# Altium PCB PIPOCPUF_2006.PCBDOC (part 5 of 6)
Units mil, origin at the board's own origin, x right, y up, seen from the top; angles counter-clockwise.
Board outline 8500 x 4525 mil, 2 copper layers (Top Layer, Top, Bottom Layer, Bottom); 345 components, 259 nets, 1116 pads, 603 vias.
Unrouted connection lines stored in the file: 781.
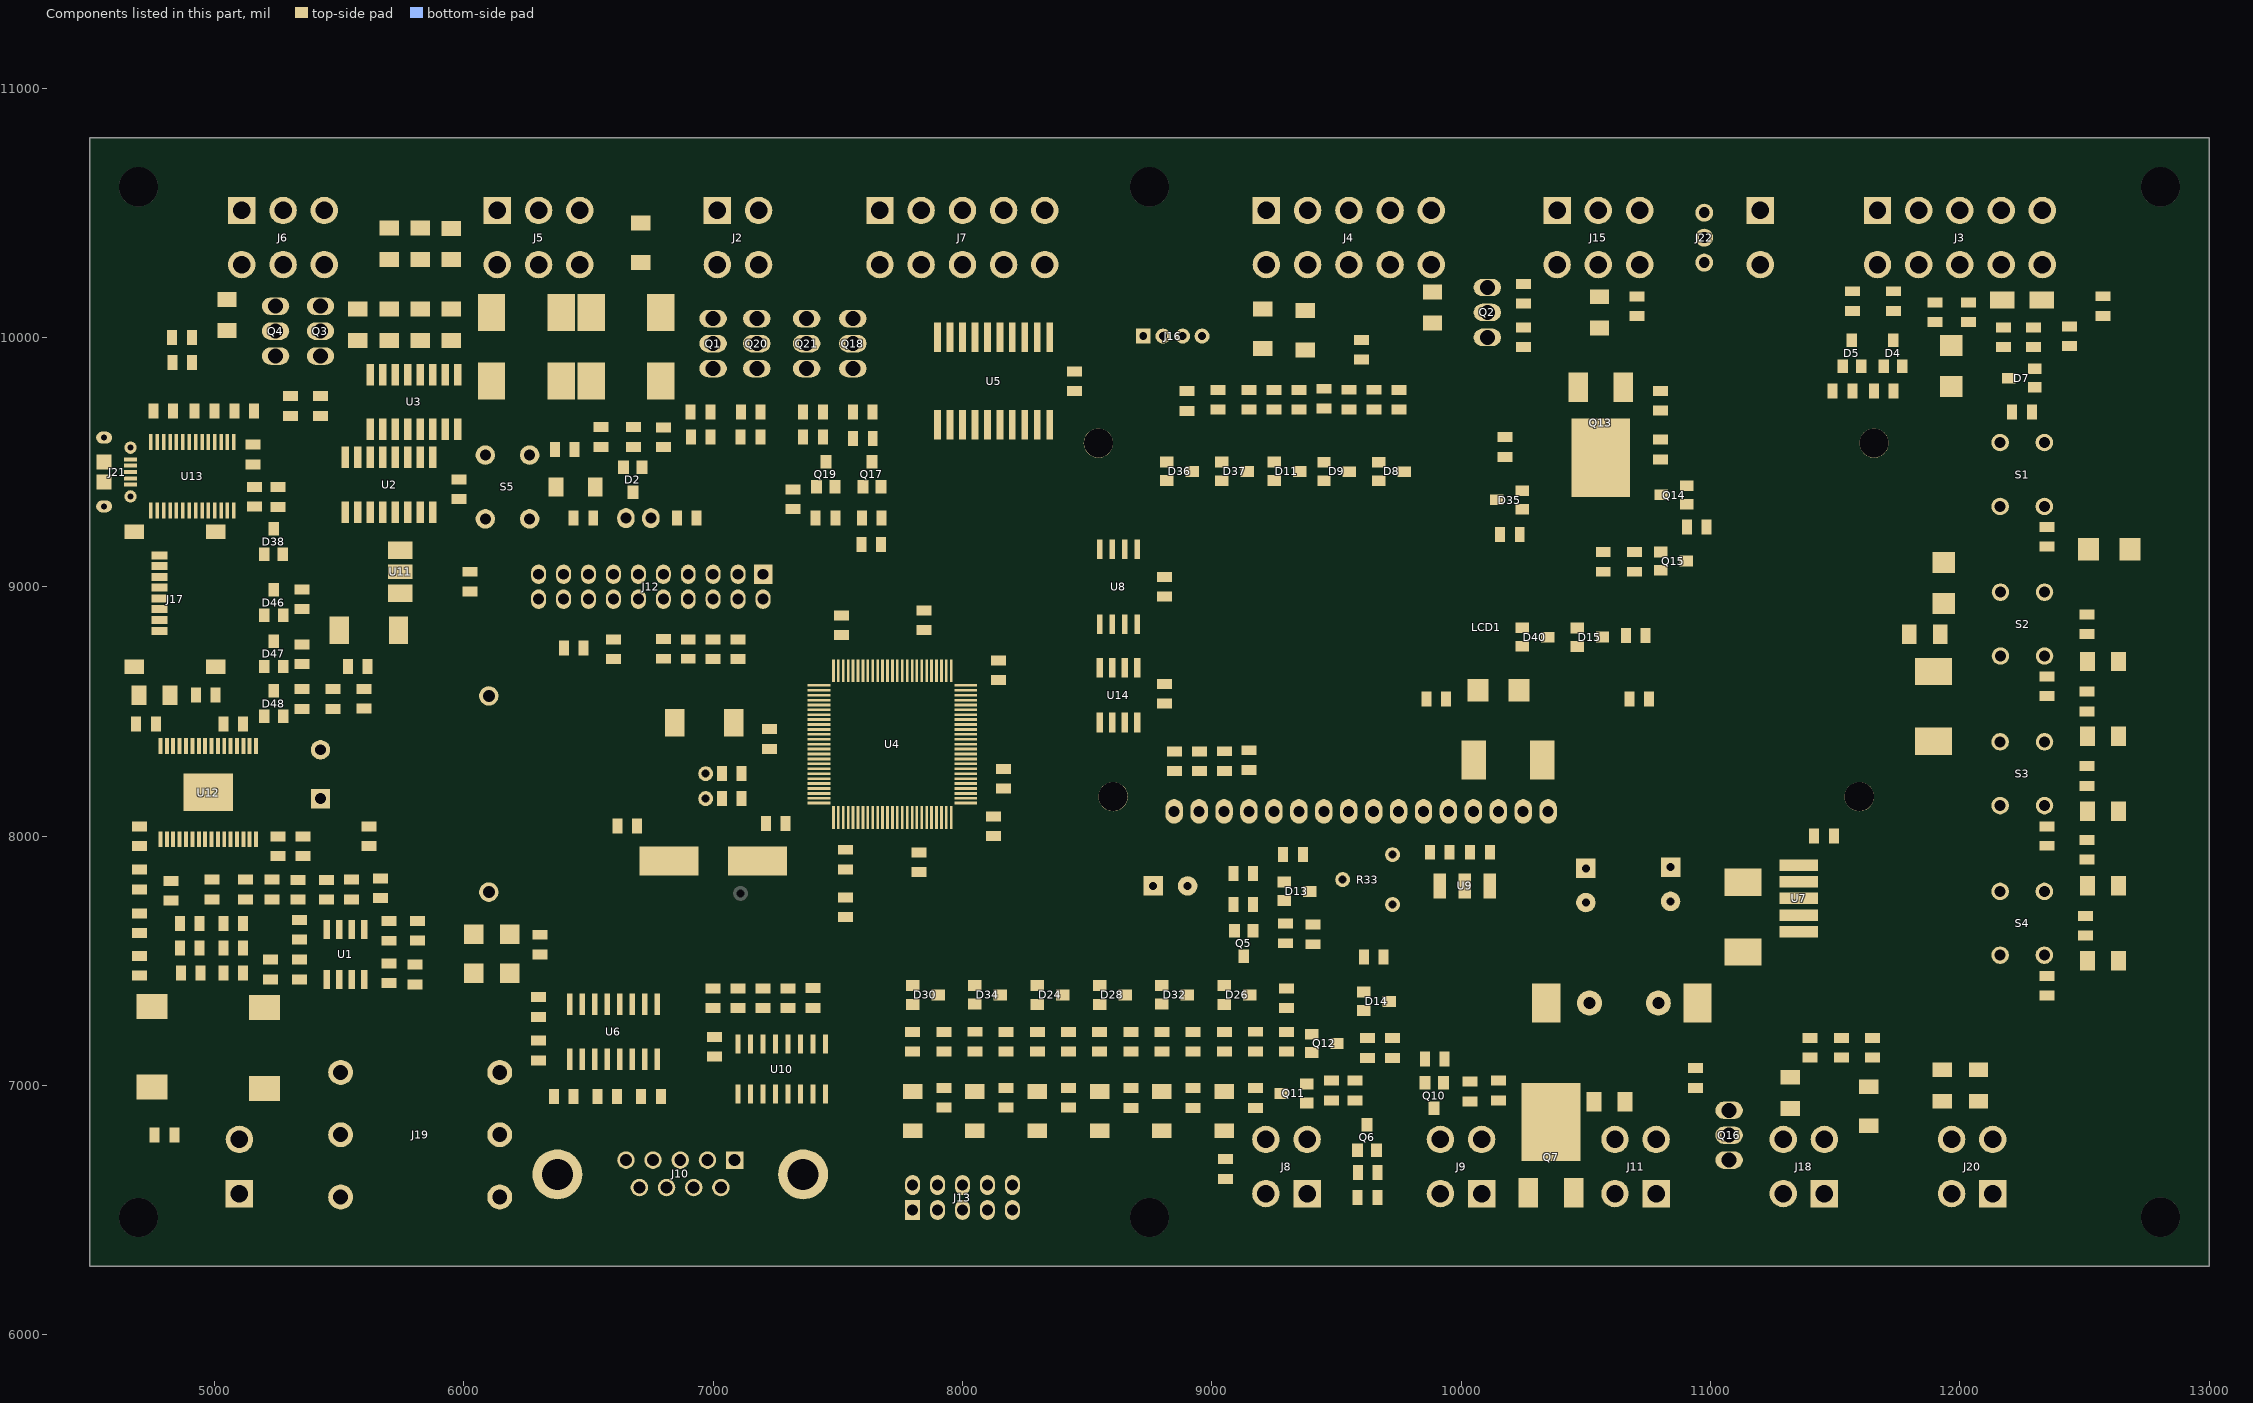
[diagram p5: the components of this part, seen from the top]

## Via types
v1: diameter 28, hole 16, Top Layer, Top to Bottom Layer, Bottom, 595 vias
v2: diameter 36, hole 24, Top Layer, Top to Bottom Layer, Bottom, 4 vias
v3: diameter 40, hole 24, Top Layer, Top to Bottom Layer, Bottom, 4 vias

## Nets (pads, with @x,y where several pads share a name; then routed paths per layer and width w, separated by ;. In a path a pad name is that pad's centre, name@x,y a point inside that pad or via, vN(x,y) a via of type N, cw(c..) or ccw(c..) an arc to the next point about the centre after c; other vN are vias at no path point) (continued)
copper on no net: (continued)
  Bottom Layer, Bottom w20: 4600,6715 5053,6715 ; 4600,6730 5038,6730 ; 4600,6745 5026,6745 ; 4600,6760 5022,6760 ; 4600,6775 5018,6775 ; 4600,6790 5018,6790 ; 4600,6805 5022,6805 ; 4600,6820 5026,6820 ; 4600,6835 5037,6835 ; 4600,6850 5052,6850 ; 4600,6865 5093,6865 ; 4600,6880 5350,6880 ; 4600,6895 5350,6895 ; 4600,6910 5350,6910 ; 4600,6925 5350,6925 ; 4600,6940 5350,6940 ; 4600,6955 5350,6955 ; 4600,6970 5350,6970 ; 4600,6985 5350,6985 ; 4600,7000 5350,7000 ; 4600,7015 5350,7015 ; 4600,7030 5350,7030 ; 4600,7045 5350,7045 ; 4600,7060 5350,7060 ; 4600,7075 5350,7075 ; 4600,7090 5350,7090 ; 4600,7105 5350,7105 ; 4600,7120 5350,7120 ; 4600,7135 5350,7135 ; 4600,7150 5350,7150 ; 4600,7165 5350,7165 ; 4600,7180 5350,7180 ; 4600,7195 5350,7195 ; 4600,7210 5800,7210 ; 4600,7225 5800,7225 ; 4600,7240 5800,7240 ; 4600,7255 5800,7255 ; 4600,7270 5800,7270 ; 4600,7285 5800,7285 ; 4600,7300 5800,7300 ; 4600,7315 5800,7315 ; 4600,7330 5800,7330 ; 4600,7345 5800,7345 ; 4600,7360 5800,7360 ; 4600,7375 5800,7375 ; 4600,7390 5800,7390 ; 4600,7405 5800,7405 ; 4600,7420 5800,7420 ; 4600,7435 5800,7435 ; 4600,7450 5800,7450 ; 4600,7465 5800,7465 ; 4600,7480 5800,7480 ; 4600,7495 5800,7495 ; 4600,7510 5800,7510 ; 4600,7525 5800,7525 ; 4600,7540 5800,7540 ; 4600,7555 5800,7555 ; 4600,7570 5800,7570 ; 4600,7585 5800,7585 ; 4600,7600 5800,7600 ; 4600,7615 5800,7615 ; 4600,7630 5800,7630 ; 4600,7645 4753,7645 ; 4600,7660 4738,7660 ; 4600,7675 4734,7675 ; 4600,7690 4736,7690 ; 4600,7705 4628,7705 ; 4600,7720 4613,7720 ; 4600,7735 4609,7735 ; 4600,7750 4611,7750 ; 4600,7765 4618,7765 ; 4600,7780 4644,7780 ; 4600,7795 5800,7795 ; 4655,7780 5800,7780 ; v1@4767,7680 4733,7680 ; v1@4775,7672 4775,7638 ; v1@4783,7680 4816,7680 ; 4796,7645 5800,7645 ; 4800,8565 5128,8565 ; 4800,8580 4862,8580 ; 4800,8595 4847,8595 ; 4800,8610 4823,8610 ; 4800,8625 4816,8625 ; 4800,8640 4814,8640 ; 4800,8655 4818,8655 ; 4800,8670 4833,8670 ; 4800,8685 5057,8685 ; 4800,8700 5042,8700 ; 4800,8715 5027,8715 ; 4800,8730 5012,8730 ; 4800,8745 4997,8745 ; 4800,8760 4982,8760 ; 4800,8775 4967,8775 ; 4800,8790 4952,8790 ; 4800,8805 4937,8805 ; 4800,8820 4922,8820 ; 4800,8835 4823,8835 ; 4800,8850 4812,8850 ; 4800,8865 4808,8865 ; 4800,8880 4812,8880 ; 4800,8895 4803,8895 ; 4800,9099 4802,9099 ; 4811,7660 4959,7660 ; 4813,7690 4926,7690 ; 4814,9114 4827,9114 ; 4815,7675 4933,7675 ; 4829,9129 4903,9129 ; v1(4840,8955) 5270,8955 v1(5290,8975) ; 4842,9114 4899,9114 ; 4844,9144 4917,9144 ; 4859,9159 5889,9159 ; 4874,9174 5904,9174 ; 4876,8670 5072,8670 ; v1@4887,9409 4920,9409 ; v1@4887,9516 4920,9516 ; 4889,9189 5291,9189 ; 4891,8655 5087,8655 ; 4897,8640 5102,8640 ; 4900,9204 5263,9204 ; 4900,9294 6024,9294 ; 4900,9309 6018,9309 ; 4900,9324 6004,9324 ; 4900,9459 5487,9459 ; 4900,9474 5497,9474 ; 4900,9564 6030,9564 ; 4900,9579 4947,9579 ; 4900,9594 4924,9594 ; 4900,9609 4908,9609 ; 4900,9675 4914,9675 ; 4900,9690 5211,9690 ; 4900,9705 5219,9705 ; 4900,9720 5247,9720 ; 4900,9735 5594,9735 ; 4902,9549 5187,9549 ; 4909,9489 5188,9489 ; 4915,9534 5177,9534 ; 4917,9504 5177,9504 ; 4918,9414 5498,9414 ; 4919,9519 5173,9519 ; v1@4957,7700 4923,7700 ; 4962,9144 5874,9144 ; v1@4965,7692 4965,7658 ; 4970,7660 5124,7660 ; v1(4970,9905) 5020,9855 5320,9855 5390,9925 5425,9925 ; v1@4973,7700 5006,7700 ; 4978,8903 5723,8903 ; 4993,8888 5738,8888 ; 4996,7675 5098,7675 ; 5003,7690 5091,7690 ; 5008,8873 5753,8873 ; 5053,8783 6588,8783 ; 5068,8768 6603,8768 ; 5083,8753 6622,8753 ; 5098,8738 5406,8738 ; 5101,9339 6000,9339 ; 5102,9399 6039,9399 ; 5106,6865 5350,6865 ; 5112,9354 6001,9354 ; 5112,9384 6024,9384 ; 5113,8723 5391,8723 ; 5116,9369 6007,9369 ; v1@5122,7700 5088,7700 ; 5128,8708 5376,8708 ; v1@5130,7692 5130,7658 ; 5135,7660 5224,7660 ; 5136,9219 5256,9219 ; 5137,9279 6020,9279 ; v1@5138,7700 5171,7700 ; v1@5140,9610 v1(5420,9610) ; 5143,8693 5361,8693 ; 5146,6715 5350,6715 ; 5147,6850 5350,6850 ; 5147,9234 5254,9234 ; 5147,9264 5272,9264 ; v1(5150,8530) 5475,8530 5525,8480 5560,8445 v1(5605,8445) ; 5151,9249 5258,9249 ; 5158,8678 5346,8678 ; 5161,6730 5350,6730 ; 5161,7675 5198,7675 ; 5162,6835 5350,6835 ; 5168,7690 5191,7690 ; 5172,8564 6033,8564 ; 5173,6745 5350,6745 ; 5173,6820 5350,6820 ; 5177,6760 5350,6760 ; 5177,6805 5350,6805 ; 5181,6775 5350,6775 ; 5181,6790 5350,6790 ; v1@5207,9520 5173,9520 ; 5209,9675 4955,9675 ; 5213,9660 4970,9660 ; v1@5215,9512 5215,9478 ; v1@5215,9528 5215,9561 ; v1@5222,7700 5188,7700 ; v1@5230,7692 5230,7658 ; 5235,7660 5258,7660 ; 5252,9720 5459,9720 ; v1@5255,9512 5255,9478 ; v1(5255,9520) 5450,9520 v1(5525,9445) v1(5725,9445) v1(6040,9445) ; v1@5255,9528 5255,9561 ; v1@5263,9520 5296,9520 ; 5276,8918 5708,8918 ; 5281,9489 6032,9489 ; 5282,9549 6024,9549 ; 5292,9504 6025,9504 ; 5292,9534 6020,9534 ; 5295,7750 5757,7750 ; v1(5295,9230) v1(5575,9230) v1(5890,9230) ; 5296,9519 6020,9519 ; 5298,9189 5571,9189 ; 5301,7660 5800,7660 ; 5302,9129 5859,9129 ; 5303,8933 5693,8933 ; 5307,7735 5753,7735 ; 5313,7720 5757,7720 ; 5316,7675 5800,7675 ; 5318,7705 5768,7705 ; 5320,7690 5800,7690 ; 5320,8948 5678,8948 ; 5326,8993 5633,8993 ; 5328,8963 5663,8963 ; 5330,8978 5648,8978 ; 5375,8798 6564,8798 ; 5378,8858 5768,8858 ; 5387,8813 6556,8813 ; 5387,8843 5783,8843 ; 5391,8828 5802,8828 ; 5401,8579 6037,8579 ; 5416,8594 6041,8594 ; 5431,8609 6055,8609 ; 5446,8624 6081,8624 ; 5446,9579 6045,9579 ; 5457,9594 6083,9594 ; 5461,8639 6474,8639 ; 5461,9609 6927,9609 ; 5476,8654 6458,8654 ; 5483,9444 4900,9444 ; 5487,9429 4914,9429 ; v1@5517,9445 5483,9445 ; v1@5525,9437 5525,9403 ; v1@5525,9453 5525,9486 ; v1@5533,9445 5566,9445 ; 5551,9414 5698,9414 ; 5552,9474 5697,9474 ; 5562,9429 5687,9429 ; 5562,9459 5687,9459 ; 5566,9444 5683,9444 ; 5578,9189 5886,9189 ; 5586,9720 5500,9720 ; 5650,7964 6037,7964 ; 5650,7979 6459,7979 ; 5650,7994 6459,7994 ; 5650,8009 6459,8009 ; 5650,8024 6459,8024 ; 5650,8039 6459,8039 ; 5650,8054 6459,8054 ; 5650,8069 6459,8069 ; 5650,8084 6459,8084 ; 5650,8099 6459,8099 ; 5650,8114 6459,8114 ; 5650,8129 6459,8129 ; 5650,8144 6459,8144 ; 5650,8159 6459,8159 ; 5650,8174 6459,8174 ; 5650,8189 6459,8189 ; 5650,8204 6459,8204 ; 5650,8219 6459,8219 ; 5650,8234 6459,8234 ; 5650,8249 6459,8249 ; 5650,8264 6459,8264 ; 5650,8279 6459,8279 ; 5650,8294 6459,8294 ; 5650,8309 5769,8309 ; 5650,8324 5757,8324 ; 5650,8429 5851,8429 ; 5650,8444 5888,8444 ; 5650,8459 5874,8459 ; 5650,8474 5859,8474 ; 5650,8489 5855,8489 ; 5650,8504 5856,8504 ; 5650,8519 5862,8519 ; 5650,8534 5887,8534 ; 5650,8549 6036,8549 ; 5660,7860 v1(5660,7900) ; 5672,9114 5844,9114 ; 5682,8399 5822,8399 ; 5687,9099 5797,9099 ; 5688,8384 5818,8384 ; 5689,8369 5767,8369 ; v1(5700,10187) 5725,10187 5775,10137 5862,10137 5937,10212 6387,10212 6462,10287 6465,10292 ; 5702,9084 5787,9084 ; 5717,9069 5783,9069 ; v1@5717,9445 5683,9445 ; v1@5725,9437 5725,9403 ; v1@5725,9453 5725,9486 ; 5732,9054 5787,9054 ; v1@5733,9445 5766,9445 ; 5747,9039 5798,9039 ; 5751,9414 6013,9414 ; 5752,9474 6012,9474 ; 5753,8339 5670,8339 ; 5757,8354 5685,8354 ; 5762,9024 5844,9024 ; 5762,9429 6002,9429 ; 5762,9459 6002,9459 ; v1(5762,10375) 5774,10387 6237,10387 6300,10324 6300,10292 ; 5766,9444 5998,9444 ; 5768,7765 5280,7765 ; 5777,9009 5817,9009 ; v1(5795,8340) 5895,8340 5910,8355 6150,8355 6180,8385 v1(6580,8385) ; v1(5825,8970) 5845,8970 6015,9140 6275,9140 12725,9140 12725,9120 ; v1(5825,9070) 5850,9070 5830,9070 5855,9070 5955,9170 6015,9170 6260,9170 12515,9170 v1@12600,9255 ; v1(5825,10175) 5942,10292 6134,10292 ; 5832,8414 5658,8414 ; v1(5860,8385) 5875,8400 6125,8400 6150,8425 6445,8425 6455,8435 v1(7155,8435) ; 5873,8943 6060,8943 ; 5888,8958 6060,8958 ; 5893,9189 5919,9189 ; 5900,7480 5903,7480 ; 5900,7495 6307,7495 ; 5900,7510 6292,7510 ; 5900,7525 6277,7525 ; 5900,7540 6057,7540 ; 5900,7555 6042,7555 ; 5900,7570 6027,7570 ; 5900,7585 6012,7585 ; 5900,7600 5997,7600 ; 5900,7615 5982,7615 ; 5900,7630 5967,7630 ; 5900,7645 5952,7645 ; 5900,7660 5937,7660 ; 5900,7675 5922,7675 ; 5900,7690 5907,7690 ; 5900,7919 6005,7919 ; 5900,7934 6006,7934 ; 5900,7949 6012,7949 ; 5902,8534 6040,8534 ; 5903,8973 6066,8973 ; 5912,9264 6020,9264 ; 5915,8309 6409,8309 ; 5918,8988 6089,8988 ; 5921,9204 5944,9204 ; v1@5922,8445 5888,8445 ; 5926,9249 6024,9249 ; 5928,9219 6046,9219 ; v1@5930,7458 5930,7491 ; 5930,9234 6031,9234 ; 5933,9003 6258,9003 ; v1@5938,7450 5971,7450 ; 5948,9018 6248,9018 ; 5956,7480 6278,7480 ; 5963,9033 6244,9033 ; 5967,7465 6263,7465 ; 5978,9048 6242,9048 ; 5993,9063 6036,9063 ; 6008,9078 6019,9078 ; v1@6032,9445 5998,9445 ; v1(6040,9345) 6080,9385 v1(6590,9385) 6560,9385 ; v1@6040,9437 6040,9403 ; v1@6040,9453 6036,9485 ; v1@6048,9445 6081,9445 ; 6052,7964 6459,7964 ; v1(6055,9100) 6280,9100 6300,9080 6300,9050 ; 6077,7949 6459,7949 ; 6077,9429 7227,9429 ; 6077,9459 6768,9459 ; 6081,9444 6796,9444 ; 6085,9255 6135,9205 6340,9205 6355,9220 v1(6520,9220) ; 6088,9594 6261,9594 ; 6089,9339 6636,9339 ; v1@6092,8950 6058,8950 ; v1@6100,8958 6100,8991 ; v1@6108,8950 6141,8950 ; 6110,8988 6250,8988 ; 6118,8624 6579,8624 ; 6124,9474 6225,9474 ; 6125,9219 6224,9219 ; 6125,9324 6224,9324 ; 6126,9579 6223,9579 ; 6133,8973 6245,8973 ; 6139,8943 6242,8943 ; 6139,8958 6242,8958 ; 6139,9489 6210,9489 ; 6140,9234 6209,9234 ; 6140,9309 6209,9309 ; 6141,9564 6208,9564 ; 6144,8609 6814,8609 ; 6146,9504 6203,9504 ; 6147,9249 6202,9249 ; 6147,9294 6202,9294 ; 6147,9549 6202,9549 ; 6151,9264 6198,9264 ; 6151,9279 6198,9279 ; 6151,9519 6198,9519 ; 6151,9534 6198,9534 ; 6158,8594 6829,8594 ; 6159,8534 7285,8534 ; 6162,8579 6853,8579 ; 6163,8549 6892,8549 ; 6166,8564 6868,8564 ; 6170,8324 6397,8324 ; 6173,7874 6459,7874 ; 6188,7859 6459,7859 ; 6189,8339 6393,8339 ; 6203,7844 6459,7844 ; 6218,7829 6459,7829 ; 6233,7814 6459,7814 ; 6248,7799 6459,7799 ; 6263,7784 6459,7784 ; 6266,9594 6898,9594 ; 6278,7769 6459,7769 ; v1@6292,7445 6259,7450 ; 6293,7754 6459,7754 ; v1@6300,7453 6300,7486 ; 6302,9474 6761,9474 ; 6303,9219 6478,9219 ; 6303,9324 6609,9324 ; 6304,9579 6885,9579 ; v1@6308,7445 6340,7450 ; 6308,7739 6464,7739 ; 6317,9489 6759,9489 ; 6318,9234 6482,9234 ; 6318,9309 6595,9309 ; 6319,9564 6874,9564 ; 6321,7480 6322,7480 ; 6324,9504 6763,9504 ; 6325,9249 6492,9249 ; 6325,9294 6591,9294 ; 6325,9549 6870,9549 ; 6329,9264 6589,9264 ; 6329,9279 6587,9279 ; 6329,9519 6777,9519 ; 6329,9534 6872,9534 ; 6336,7465 6803,7465 ; v1@6512,9220 6478,9220 ; v1@6520,9228 6520,9261 ; 6525,8639 6564,8639 ; 6535,7739 6635,7739 ; 6537,8654 6560,8654 ; 6540,7754 6620,7754 ; 6540,7769 6605,7769 ; 6540,7784 6590,7784 ; 6540,7799 6576,7799 ; 6540,7814 6570,7814 ; 6540,7829 6566,7829 ; 6540,7844 6566,7844 ; 6540,7859 6566,7859 ; 6540,7874 6566,7874 ; 6540,7889 6566,7889 ; 6540,7904 6563,7904 ; 6540,7919 6567,7919 ; 6540,7934 6577,7934 ; 6540,7949 7359,7949 ; 6540,7964 7359,7964 ; 6540,7979 7162,7979 ; 6540,7994 7134,7994 ; 6540,8009 7126,8009 ; 6540,8024 7124,8024 ; 6540,8039 7128,8039 ; 6540,8054 7142,8054 ; 6540,8069 7299,8069 ; 6540,8084 7295,8084 ; 6540,8099 6942,8099 ; 6540,8114 6926,8114 ; 6540,8129 6917,8129 ; 6540,8144 6913,8144 ; 6540,8159 6914,8159 ; 6540,8174 6918,8174 ; 6540,8189 6930,8189 ; 6540,8204 6936,8204 ; 6540,8219 6921,8219 ; 6540,8234 6916,8234 ; 6540,8249 6912,8249 ; 6540,8264 6915,8264 ; 6540,8279 6920,8279 ; 6540,8294 6935,8294 ; 6541,8669 6561,8669 ; v1(6560,9220) 6565,9220 6575,9210 v1(7200,9210) ; v1(6580,10300) 7015,10300 ; 6587,9249 6593,9249 ; 6592,8309 7129,8309 ; v1(6600,8660) 6610,8670 v1(6900,8670) v1(7000,8670) v1(7100,8670) ; v1(6605,7905) 6605,7825 6710,7720 v1@7465,7720 ; 6616,8324 7114,8324 ; 6616,9354 6689,9354 ; 6617,9414 6717,9414 ; 6627,9369 6685,9369 ; 6627,9399 6692,9399 ; 6631,8339 7110,8339 ; 6631,9384 6686,9384 ; 6632,7934 7359,7934 ; 6642,7919 7359,7919 ; 6643,7844 7298,7844 ; 6643,7859 7312,7859 ; 6643,7874 7359,7874 ; 6643,7889 7359,7889 ; 6646,7904 7359,7904 ; 6646,8354 7111,8354 ; 6655,7829 7294,7829 ; 6663,9339 6703,9339 ; 6670,7814 7075,7814 ; 6685,7799 7060,7799 ; 6690,9324 6709,9324 ; 6700,7784 7055,7784 ; 6715,7769 7052,7769 ; 6732,9414 7192,9414 ; 6776,9399 7182,9399 ; 6792,9384 7178,9384 ; v1@6792,9485 6758,9485 ; v1@6800,9477 6800,9443 ; v1(6800,9485) v1(6930,9485) ; v1@6800,9493 6800,9526 ; 6803,9444 6926,9444 ; 6807,9369 6902,9369 ; v1@6808,9485 6841,9485 ; 6810,8624 6620,8624 ; 6822,9354 6892,9354 ; 6822,9519 6880,9519 ; 6831,9459 6898,9459 ; 6836,9504 6893,9504 ; 6837,9339 6888,9339 ; 6838,9474 6891,9474 ; 6840,9489 6889,9489 ; 6846,7465 6962,7465 ; v1(6850,9700) v1(7700,9700) ; 6852,9324 6892,9324 ; 6861,7480 6973,7480 ; 6865,7495 7494,7495 ; 6867,9309 6903,9309 ; v1@6922,9340 6888,9340 ; v1@6922,9485 6888,9485 ; v1@6930,9348 6930,9381 ; v1@6930,9477 6930,9443 ; 6933,9444 7237,9444 ; v1@6938,9340 6971,9340 ; v1@6938,9485 6971,9485 ; 6949,9534 7419,9534 ; 6952,9519 7434,9519 ; 6956,9309 7468,9309 ; 6957,9369 7182,9369 ; 6961,9459 7321,9459 ; 6966,9504 7337,9504 ; 6967,9324 7454,9324 ; 6967,9354 7193,9354 ; 6968,9474 7319,9474 ; 6970,9489 7323,9489 ; 6971,9339 7450,9339 ; v1@6992,7450 6958,7450 ; 6997,8099 7296,8099 ; v1@7000,7458 7000,7491 ; 7003,8204 7134,8204 ; 7004,8294 7213,8294 ; v1(7005,7240) 7005,7265 ; v1@7008,7450 7041,7450 ; 7009,8189 7226,8189 ; 7013,8114 7302,8114 ; 7018,8219 7122,8219 ; 7019,8279 7228,8279 ; 7021,8174 7222,8174 ; 7022,8129 7234,8129 ; 7023,8234 7118,8234 ; 7024,8264 7132,8264 ; 7025,8159 7218,8159 ; 7026,7480 7173,7480 ; 7026,8144 7222,8144 ; 7027,8249 7122,8249 ; v1@7037,7465 7162,7465 ; v1(7120,7260) v1@7120,7270 ; v1@7142,8345 7108,8345 ; 7144,7814 7296,7814 ; v1@7150,8337 7150,8303 ; v1@7152,8235 7118,8235 ; v1@7157,8020 7123,8020 ; 7159,7799 7304,7799 ; v1@7160,8227 7160,8193 ; v1@7160,8243 7160,8276 ; 7164,7784 7332,7784 ; v1@7165,8012 7165,7978 ; v1@7165,8028 7165,8061 ; 7167,7769 7377,7769 ; 7167,7979 7359,7979 ; v1@7168,8235 7201,8235 ; v1@7173,8020 7206,8020 ; 7185,8204 7224,8204 ; 7187,8054 7314,8054 ; 7187,8264 7232,8264 ; v1@7192,7450 7158,7450 ; 7195,7994 7359,7994 ; 7197,8219 7228,8219 ; 7197,8249 7226,8249 ; 7198,8309 7170,8309 ; v1@7200,7458 7200,7491 ; 7201,8039 7359,8039 ; 7201,8234 7225,8234 ; 7203,8009 7359,8009 ; 7205,8024 7359,8024 ; v1@7208,7450 v1@7241,7450 ; 7226,7480 7373,7480 ; v1@7237,7465 7362,7465 ; 7241,8903 7734,8903 ; 7251,8918 7722,8918 ; 7252,8978 7699,8978 ; 7255,8933 7718,8933 ; 7256,8963 7701,8963 ; 7256,8993 7639,8993 ; 7257,8948 7709,8948 ; 7263,9008 7627,9008 ; 7263,9023 7589,9023 ; 7263,9038 7577,9038 ; 7263,9053 7554,9053 ; 7263,9068 7429,9068 ; v1(7270,9895) 7270,10060 ; 7292,9444 7328,9444 ; 7307,8129 7327,8129 ; v1@7327,7825 7293,7825 ; v1@7327,8090 7293,8090 ; 7332,8144 7359,8144 ; v1@7335,7817 7335,7783 ; v1@7335,7833 7335,7866 ; v1@7335,8082 7335,8048 ; v1@7335,8098 7335,8131 ; 7337,7784 7366,7784 ; 7342,8129 7359,8129 ; 7347,8159 7359,8159 ; 7357,7859 7359,7859 ; 7359,8054 7355,8054 ; 7382,9504 7449,9504 ; v1@7392,7450 7358,7450 ; v1@7400,7458 7400,7491 ; v1@7408,7450 7441,7450 ; 7422,7769 7456,7769 ; 7426,7480 7496,7480 ; 7429,8226 7481,8226 ; 7432,9609 7786,9609 ; 7433,7784 7532,7784 ; 7435,8211 7481,8211 ; 7437,7465 7503,7465 ; 7439,7799 7504,7799 ; 7439,8256 7481,8256 ; 7440,7814 7496,7814 ; 7440,8001 7447,8001 ; 7440,8016 7459,8016 ; 7440,8031 7524,8031 ; 7440,8046 8010,8046 ; 7440,8061 7538,8061 ; 7440,8076 7516,8076 ; 7440,8091 7501,8091 ; 7440,8106 7489,8106 ; 7440,8121 7483,8121 ; 7440,8136 7481,8136 ; 7440,8151 7481,8151 ; 7440,8166 7481,8166 ; 7440,8181 7481,8181 ; 7440,8196 7481,8196 ; 7443,8271 7481,8271 ; 7443,8286 7481,8286 ; 7443,8301 7481,8301 ; 7443,8316 7481,8316 ; 7443,8331 7481,8331 ; 7443,8346 7481,8346 ; 7443,8361 7481,8361 ; 7443,8376 7481,8376 ; 7443,8391 7481,8391 ; 7443,8406 7481,8406 ; 7443,8421 7481,8421 ; 7443,8436 7481,8436 ; 7443,8451 7468,8451 ; 7443,8466 7464,8466 ; 7443,8481 7466,8481 ; 7443,8496 7474,8496 ; 7443,8511 7468,8511 ; 7443,8526 7461,8526 ; 7443,8541 7446,8541 ; 7461,9594 8393,9594 ; 7476,9579 8389,9579 ; 7481,8241 7433,8241 ; v1@7482,9345 7448,9345 ; 7490,9068 7543,9068 ; v1@7490,9337 7490,9303 ; 7491,9564 8391,9564 ; 7498,9083 7539,9083 ; v1@7498,9345 7531,9345 ; 7500,9098 7543,9098 ; 7506,9549 8395,9549 ; 7511,8016 7512,8016 ; 7511,9309 7653,9309 ; v1@7527,7490 7493,7490 ; v1@7527,7825 7493,7825 ; 7527,9534 8399,9534 ; 7529,9339 7635,9339 ; v1@7535,7482 7529,7450 ; v1@7535,7817 7535,7783 ; 7537,7784 7547,7784 ; 7537,9519 8403,9519 ; 7541,9504 8407,9504 ; v1@7667,9345 7633,9345 ; v1@7675,9337 7675,9303 ; v1@7683,9345 7716,9345 ; 7696,9309 7712,9309 ; 7697,9744 8679,9744 ; 7714,9339 8027,9339 ; 7727,9309 8009,9309 ; 7727,9729 8534,9729 ; 7737,9714 7760,9714 ; 7752,9294 8011,9294 ; 7758,9279 8018,9279 ; 7759,9264 8046,9264 ; 7785,8903 7911,8903 ; 7793,9609 8397,9609 ; 7821,9624 8401,9624 ; 7828,9639 8405,9639 ; 7881,9654 8409,9654 ; 7882,9714 8478,9714 ; 7892,9669 8424,9669 ; 7892,9699 8454,9699 ; 7896,9684 8439,9684 ; v1(7900,9870) 8425,9870 8450,9895 v1(8450,9915) ; v1(7950,9825) v1(8300,9825) v1(8350,9825) v1(8525,9825) v1(8800,9825) ; 7985,8788 8562,8788 ; 7989,8803 8579,8803 ; 7995,8818 8595,8818 ; 8007,8833 8617,8833 ; 8013,9324 7710,9324 ; v1@8038,8908 8233,8908 ; 8045,8848 8304,8848 ; 8051,8893 8248,8893 ; 8053,8863 8278,8863 ; 8053,9264 8061,9264 ; 8055,8878 8263,8878 ; 8072,9339 8310,9339 ; 8137,9489 8417,9489 ; v1@8342,9345 8308,9345 ; 8427,9474 8432,9474 ; 8437,9459 8447,9459 ; 8441,9444 8462,9444 ; v1@8450,9910 8470,9890 10050,9890 ; v1(8550,9075) v1(8650,9075) 8795,9075 v1(8800,9080) ; 8555,9729 8693,9729 ; v1(8600,8605) 8610,8615 v1(8875,8615) 10300,8615 v1(10310,8605) ; 8611,9714 11177,9714 ; 8627,9444 8742,9444 ; 8633,8418 8829,8418 ; 8635,9699 11173,9699 ; 8639,8403 8706,8403 ; 8642,9459 8757,9459 ; v1(8650,8745) v1(8865,8745) 10240,8745 v1(10275,8710) v1(10465,8710) ; 8650,9684 11177,9684 ; 8657,9474 9782,9474 ; 8665,9669 11188,9669 ; 8668,8993 11450,8993 ; 8672,9489 9792,9489 ; 8682,9504 10182,9504 ; 8684,9639 11450,9639 ; 8686,9519 8798,9519 ; 8688,9624 11450,9624 ; 8690,9534 8784,9534 ; 8692,9609 11450,9609 ; 8694,9549 8780,9549 ; 8696,9594 8812,9594 ; 8698,9564 8781,9564 ; v1(8700,8920) 8800,8920 v1(8810,8910) 8815,8910 8835,8895 10155,8895 v1(10165,8885) ; 8700,9579 8787,9579 ; 8736,9729 11187,9729 ; 8741,8226 8799,8226 ; 8745,8211 8784,8211 ; 8748,8241 9327,8241 ; 8750,8196 8769,8196 ; 8761,8256 9323,8256 ; 8763,8286 9339,8286 ; 8763,8403 9902,8403 ; 8765,8271 9328,8271 ; 8772,8388 9914,8388 ; 8776,8373 9949,8373 ; v1@8808,7451 8841,7451 ; v1@8812,9555 8778,9555 ; v1@8815,9555 v1(8820,9555) v1(9250,9555) 9670,9555 v1@9750,9555 ; v1@8818,8910 8851,8910 ; v1@8820,9547 8820,9513 ; v1@8820,9563 8820,9596 ; v1@8825,9375 9455,9375 v1@9680,9375 ; 8827,9594 9036,9594 ; v1@8828,9555 8861,9555 ; 8837,7465 8838,7465 ; 8837,9093 11450,9093 ; 8841,9519 9017,9519 ; 8850,8913 10136,8913 ; 8852,9579 9008,9579 ; 8858,9564 9001,9564 ; 8859,9549 8999,9549 ; v1@8865,7487 8865,7453 ; 8880,8418 9898,8418 ; 8892,8433 9902,8433 ; 8896,8448 9911,8448 ; v1@8900,7487 8900,7453 ; v1@8908,7495 8941,7495 ; 8926,7465 9012,7465 ; 8937,7480 9022,7480 ; 8945,9326 10272,9326 ; 8957,9311 9120,9311 ; 8964,7819 9003,7819 ; 8967,7789 9481,7789 ; 8969,7804 9472,7804 ; 9003,9534 8855,9534 ; v1@9032,9554 8998,9554 ; v1@9040,9546 9040,9512 ; v1@9040,9562 9040,9595 ; v1@9042,7451 9008,7451 ; 9043,9594 9242,9594 ; v1@9048,9554 9081,9554 ; v1@9050,7459 9050,7492 ; 9056,7819 9468,7819 ; v1@9058,7451 9091,7451 ; 9062,9519 9228,9519 ; 9067,7834 9469,7834 ; 9071,7849 9086,7849 ; 9071,9579 9217,9579 ; 9073,8613 9841,8613 ; 9076,9534 9214,9534 ; 9077,7480 9578,7480 ; 9078,9564 9211,9564 ; 9080,9549 9210,9549 ; 9086,8598 9139,8598 ; 9087,7465 9571,7465 ; 9159,9311 10282,9311 ; 9160,8598 10270,8598 ; 9175,9296 11450,9296 ; 9179,9266 11450,9266 ; 9179,9281 11450,9281 ; 9183,8583 10274,8583 ; 9189,8568 10291,8568 ; v1(9240,7920) 9725,7920 ; v1@9242,9555 9208,9555 ; v1@9250,9547 9250,9513 ; v1@9250,9563 9250,9596 ; 9257,9594 9446,9594 ; v1@9258,9555 9291,9555 ; 9271,9519 9427,9519 ; 9282,9579 9418,9579 ; 9288,9564 9411,9564 ; 9289,9549 9409,9549 ; v1(9305,7075) v1(9405,7075) v1(10000,7075) ; 9413,9534 9285,9534 ; v1(9425,7010) v1(9760,7010) ; v1@9442,9554 9408,9554 ; v1@9450,9546 9450,9512 ; v1@9450,9562 9450,9595 ; 9453,9594 9666,9594 ; v1@9458,9554 9491,9554 ; 9472,9519 9647,9519 ; 9481,9579 9638,9579 ; 9486,9534 9633,9534 ; 9488,9564 9631,9564 ; 9490,9549 9629,9549 ; v1@9602,7455 9568,7455 ; 9604,7495 8941,7495 ; v1@9610,7463 9610,7496 ; 9615,7495 9793,7495 ; v1@9618,7455 9651,7455 ; 9641,7480 9797,7480 ; 9648,7465 9796,7465 ; 9648,8883 10123,8883 ; v1@9662,9554 9628,9554 ; v1@9665,9375 10215,9375 10240,9400 v1(10240,9435) ; v1@9670,9546 9670,9512 ; v1@9670,9562 9670,9595 ; 9673,8868 10127,8868 ; 9673,9594 9747,9594 ; v1@9678,9554 9711,9554 ; 9682,8853 10139,8853 ; 9692,9519 9733,9519 ; 9701,9579 9722,9579 ; 9706,9534 9719,9534 ; 9708,9564 9716,9564 ; 9710,9549 9715,9549 ; v1@9747,9555 9713,9555 ; v1@9755,9547 9755,9513 ; v1@9755,9563 9755,9596 ; 9760,6415 v1(9760,6485) ; 9762,9594 10307,9594 ; v1@9763,9555 9796,9555 ; 9776,9519 10197,9519 ; 9787,9579 10282,9579 ; 9793,9564 10276,9564 ; 9794,9549 10275,9549 ; v1@9827,7455 9793,7455 ; v1@9827,7495 9793,7495 ; 9847,9489 10167,9489 ; 9857,9444 10122,9444 ; 9857,9474 10152,9474 ; 9861,9459 10137,9459 ; 9878,8613 10270,8613 ; 9895,8628 10224,8628 ; 9899,8643 10198,8643 ; 10127,8898 8848,8898 ; v1@10157,8885 10123,8885 ; v1@10160,8880 v1(10165,8885) ; v1@10165,8877 10165,8843 ; v1@10173,8885 10205,8879 ; 10190,8853 10219,8853 ; 10202,8868 10207,8868 ; 10227,9341 10268,9341 ; v1@10237,8885 10205,8879 ; v1@10245,8877 10245,8843 ; 10251,9356 10272,9356 ; v1@10253,8885 10286,8885 ; 10266,9371 10284,9371 ; 10270,8853 10439,8853 ; 10273,8913 10436,8913 ; 10273,9386 11391,9386 ; 10278,9401 11376,9401 ; 10278,9416 10292,9416 ; 10282,8868 10427,8868 ; 10282,8898 10427,8898 ; 10286,8883 10423,8883 ; v1@10302,8605 10268,8605 ; v1@10302,9340 10268,9340 ; v1@10307,9555 10273,9555 ; v1@10310,8597 10310,8563 ; v1@10310,9332 10310,9298 ; v1@10310,9348 10310,9381 ; v1@10315,9442 10315,9408 ; v1(10315,9450) v1(10905,9450) ; v1(10315,9555) v1(9755,9555) ; v1@10315,9563 10315,9596 ; v1@10318,8605 10351,8605 ; v1@10318,9340 10351,9340 ; 10322,9594 11450,9594 ; v1@10323,9450 10356,9450 ; v1@10323,9555 10356,9555 ; 10328,8568 11231,8568 ; 10335,9371 11413,9371 ; 10337,9311 11450,9311 ; 10337,9416 10882,9416 ; 10345,8583 11450,8583 ; 10347,9326 11450,9326 ; 10347,9356 11450,9356 ; 10347,9579 11450,9579 ; 10349,8598 11450,8598 ; 10349,8613 11450,8613 ; 10351,9341 11450,9341 ; 10351,9431 10868,9431 ; 10353,9461 10866,9461 ; 10353,9564 11450,9564 ; 10354,9549 11450,9549 ; 10355,9446 10864,9446 ; 10389,8158 11440,8158 ; 10403,8143 11444,8143 ; 10407,8068 11450,8068 ; 10407,8128 11448,8128 ; 10411,8083 11450,8083 ; 10412,8098 11450,8098 ; v1@10457,8885 10423,8885 ; v1@10465,8877 10465,8843 ; v1(10465,8885) v1(10245,8885) v1(10165,8885) ; v1@10470,8885 v1(10695,8885) v1(10800,8885) ; v1@10473,8885 10506,8885 ; v1@10480,9885 v1@10800,9885 ; 10483,8053 11191,8053 ; 10490,8853 10526,8853 ; 10492,8038 10851,8038 ; 10493,8913 10666,8913 ; 10496,8023 10739,8023 ; v1(10500,8315) 11700,8315 11735,8280 v1(12570,8280) ; 10502,8868 10533,8868 ; 10502,8898 10657,8898 ; 10506,8883 10546,8883 ; 10552,7693 10792,7693 ; 10560,7708 10780,7708 ; 10561,7753 10776,7753 ; 10564,7723 10776,7723 ; 10565,7738 10772,7738 ; 10565,7843 10774,7843 ; 10565,7858 10774,7858 ; 10565,7873 10774,7873 ; 10565,7888 10774,7888 ; 10565,7903 10774,7903 ; 10593,8883 10653,8883 ; v1(10595,7235) 10905,7235 11295,7235 11355,7295 v1@11385,7295 ; 10595,7768 10780,7768 ; 10599,7828 10776,7828 ; 10600,8823 11450,8823 ; 10606,8868 10657,8868 ; 10607,7783 10793,7783 ; 10607,7813 10786,7813 ; 10608,8838 11450,8838 ; 10610,8853 10669,8853 ; 10611,7798 10814,7798 ; 10650,8413 11450,8413 ; 10662,8428 11284,8428 ; 10666,8443 11269,8443 ; 10670,7573 10978,7573 ; 10670,8398 10494,8398 ; 10682,7588 10972,7588 ; v1@10687,8885 10653,8885 ; 10689,8398 11450,8398 ; 10690,8628 11450,8628 ; v1@10695,8877 10695,8843 ; 10698,8643 11450,8643 ; v1@10703,8885 10736,8885 ; 10704,8248 11450,8248 ; 10704,8263 11450,8263 ; 10712,8383 11450,8383 ; 10719,8368 11450,8368 ; 10720,8853 10774,8853 ; 10723,8913 10771,8913 ; 10732,8868 10762,8868 ; 10732,8898 10762,8898 ; 10736,8883 10758,8883 ; 10760,8023 10836,8023 ; 10783,8008 10821,8008 ; v1@10785,9885 v1(10985,9885) ; 10789,7993 10806,7993 ; v1@10792,8885 10758,8885 ; v1@10800,8877 10800,8843 ; v1@10808,8885 10841,8885 ; 10825,8853 11450,8853 ; 10828,8913 10893,8913 ; 10837,8868 10949,8868 ; 10837,8898 10908,8898 ; 10841,8883 10923,8883 ; 10865,7798 11450,7798 ; 10886,7783 11450,7783 ; 10887,7693 11450,7693 ; 10893,7813 11450,7813 ; v1@10897,9450 10863,9450 ; 10899,7708 11450,7708 ; 10899,7768 11450,7768 ; 10903,7723 11450,7723 ; 10903,7753 11450,7753 ; 10903,7828 11450,7828 ; 10905,7843 11450,7843 ; v1@10905,9442 10905,9408 ; v1(10905,9840) v1(11485,9840) v1(11655,9840) ; v1@10913,9450 10946,9450 ; 10916,7858 11450,7858 ; 10917,8978 11450,8978 ; 10927,9416 11361,9416 ; 10931,7873 11450,7873 ; 10938,8963 11450,8963 ; 10941,9431 11346,9431 ; 10943,9461 11316,9461 ; 10945,9446 11331,9446 ; 10946,7888 11450,7888 ; 10953,8948 11450,8948 ; 11036,7678 11450,7678 ; 11046,7663 11450,7663 ; 11047,7588 11450,7588 ; 11052,7648 11450,7648 ; 11053,7603 11450,7603 ; 11054,7618 11450,7618 ; 11054,7633 11450,7633 ; 11170,7090 11180,7075 11185,7080 ; 11195,7085 11210,7080 11210,7075 ; 11195,8173 11444,8173 ; 11198,8233 11450,8233 ; 11207,8188 11448,8188 ; 11207,8218 11450,8218 ; 11211,8203 11450,8203 ; 11238,8053 11450,8053 ; 11251,8038 11450,8038 ; 11255,8023 11450,8023 ; 11260,7005 11265,6985 11270,6985 ; 11288,8568 11450,8568 ; 11297,8553 11450,8553 ; 11325,8428 11450,8428 ; 11340,8443 11450,8443 ; 11344,8458 11450,8458 ; 11352,9519 11450,9519 ; 11367,9504 11450,9504 ; 11382,9489 11450,9489 ; 11388,8008 11450,8008 ; 11390,7903 11450,7903 ; v1(11395,7295) 11400,7295 11470,7365 v1(12295,7365) ; 11397,9474 11450,9474 ; 11405,7918 11450,7918 ; 11405,7993 11450,7993 ; 11411,7978 11450,7978 ; 11412,7933 11450,7933 ; 11412,9459 11450,9459 ; 11417,7963 11450,7963 ; 11418,7948 11450,7948 ; 11427,9444 11450,9444 ; 11450,7573 11041,7573 ; 11450,7738 10907,7738 ; 11450,8113 10412,8113 ; 11450,9008 8457,9008 ; 11450,9534 10350,9534 ; 11450,9654 8680,9654 ; v1(11615,8585) v1(12570,8585) ; v1(11625,9980) v1(11790,9980) v1(12080,9980) ; v1(11875,9875) v1(12365,9875) ; v1(11970,9720) 12045,9795 v1(12415,9795) 12700,9795 12730,9765 v1(12730,9020) ; v1(12080,9405) 12235,9405 v1(12270,9370) ; v1@12375,9880 v1(12675,9880) ; v1(12600,9250) 12675,9325 12675,9330 v1(12675,9715) ; 4600,6700 5096,6700 ; 4600,6700 5096,6700 ; 4600,6700 4600,7800 5800,7800 5800,7775 5795,7776 5774,7770 5759,7755 5753,7735 ; 4733,7680 4739,7700 4742,7704 4670,7704 4650,7698 4629,7704 4614,7719 4608,7740 4614,7760 4629,7775 4650,7781 4670,7775 5255,7775 5280,7765 ; 4733,7680 4739,7659 4754,7644 4775,7638 ; 4775,7638 4795,7644 4810,7659 4816,7680 ; 4800,8550 5113,8550 ; 4800,8550 5113,8550 ; 4800,8550 4800,8909 4804,8894 4813,8884 4808,8865 ; 4808,8865 4814,8844 4829,8829 4850,8823 4870,8829 4873,8831 4911,8831 5108,8633 4903,8633 4894,8643 4890,8655 4875,8670 4855,8676 4834,8670 4819,8655 4813,8635 4819,8614 4834,8599 4846,8595 4866,8576 4890,8566 5131,8566 5129,8565 5114,8550 5113,8550 ; 4816,7680 4810,7700 4807,7704 4924,7704 4923,7700 ; 4900,9444 4914,9429 ; 4900,9444 4900,9480 4914,9495 4920,9516 ; 4914,9429 4920,9409 ; 4914,9675 4935,9681 4955,9675 ; 4914,9675 4900,9661 4900,9750 5619,9750 5604,9745 5589,9730 5585,9718 5503,9718 5500,9720 ; 4920,9409 4919,9405 5054,9405 5075,9411 5095,9405 5110,9390 5116,9370 5110,9349 5095,9334 5075,9328 5054,9334 4900,9334 4900,9283 5086,9283 5089,9285 5110,9291 5130,9285 5145,9270 5151,9250 5145,9229 5130,9214 5110,9208 5089,9214 5086,9216 4902,9216 4900,9215 4900,9200 4800,9100 4800,9096 4814,9110 4835,9116 4855,9110 4858,9108 4898,9108 4898,9110 4904,9130 4919,9145 4940,9151 4960,9145 4963,9143 5275,9143 5298,9133 5303,9128 5645,9128 5668,9118 5792,8994 5804,9005 5825,9011 5829,9010 5850,9031 5834,9031 5825,9028 5804,9034 5789,9049 5783,9070 5789,9090 5804,9105 5825,9111 5834,9108 5838,9108 5927,9197 5955,9208 6070,9208 6052,9213 6027,9238 6018,9272 6027,9305 6028,9306 6019,9309 6004,9324 ; 4920,9516 4914,9536 4900,9551 4900,9618 4914,9604 4915,9603 4934,9584 4960,9574 5124,9574 5145,9568 5154,9571 5410,9571 5420,9568 5440,9574 5455,9589 5461,9610 5459,9618 5465,9616 7766,9616 7769,9614 7790,9608 7810,9614 7825,9629 7831,9650 7831,9651 7834,9649 7855,9643 7875,9649 7890,9664 7896,9685 7890,9705 7875,9720 7855,9726 7834,9720 7831,9718 7770,9718 7746,9708 7741,9703 7740,9703 7735,9720 7720,9735 7700,9741 7692,9739 7703,9750 8677,9750 8679,9744 ; 4923,7700 4929,7679 4944,7664 4965,7658 ; 4955,9675 4970,9660 ; 4965,7658 4985,7664 5000,7679 5006,7700 ; 4970,9660 4974,9645 ; 4974,9645 5124,9645 ; 4974,9645 5124,9645 ; 5006,7700 5005,7704 5089,7704 5088,7700 ; 5088,7700 5094,7679 5109,7664 5130,7658 ; 5096,6700 5058,6710 5027,6741 5016,6783 5027,6824 5058,6855 5100,6866 5141,6855 5172,6824 5183,6783 5172,6741 5141,6710 5103,6700 ; 5103,6700 5350,6700 ; 5103,6700 5350,6700 ; 5124,9645 5145,9651 5154,9648 5224,9648 5214,9659 5208,9680 5214,9700 5229,9715 5250,9721 5270,9715 5273,9713 5435,9713 5447,9708 5459,9720 ; 5130,7658 5150,7664 5165,7679 5171,7700 ; 5171,7700 5170,7704 5189,7704 5188,7700 ; 5173,8663 5041,8796 5216,8796 5219,8794 5240,8788 5260,8794 5263,8796 5326,8796 5329,8794 5350,8788 5370,8794 5385,8809 5391,8830 5385,8850 5370,8865 5350,8871 5329,8865 5326,8863 5263,8863 5260,8865 5240,8871 5219,8865 5216,8863 5018,8863 4966,8916 5270,8916 5297,8927 5308,8938 5310,8939 5325,8954 5331,8975 5325,8995 5320,9001 5326,9001 5329,8999 5350,8993 5370,8999 5373,9001 5626,9001 5796,8831 5820,8821 6554,8821 6559,8804 6574,8789 6586,8785 6616,8756 6634,8748 5430,8748 5406,8738 ; 5173,8663 5216,8663 ; 5173,8663 5216,8663 ; 5173,9520 5179,9540 5194,9555 5215,9561 ; 5173,9520 5179,9499 5194,9484 5215,9478 ; 5188,7700 5194,7679 5209,7664 5230,7658 ; 5215,9478 5235,9483 5255,9478 ; 5215,9561 5235,9556 5255,9561 ; 5216,8663 5219,8665 5240,8671 5260,8665 5263,8663 ; 5230,7658 5250,7664 5252,7665 5259,7659 5280,7653 5300,7659 5315,7674 5321,7695 5315,7715 5315,7716 5305,7740 5280,7765 ; 5255,9478 5275,9484 5290,9499 5296,9520 ; 5255,9561 5275,9555 5290,9540 5296,9520 ; 5263,8663 5321,8663 ; 5263,8663 5321,8663 ; 5321,8663 5324,8665 5336,8669 5406,8738 ; 5350,6700 5350,7200 5800,7200 5800,7694 5795,7693 5774,7699 5759,7714 5753,7735 ; 5459,9720 5480,9726 5500,9720 ; 5483,9445 5489,9465 5504,9480 5525,9486 ; 5483,9445 5489,9424 5504,9409 5525,9403 ; 5525,9403 5545,9409 5560,9424 5566,9445 ; 5525,9486 5545,9480 5560,9465 5566,9445 ; 5658,8414 5670,8410 5685,8395 5691,8375 5685,8354 ; 5658,8414 5650,8422 5650,8550 5186,8550 5185,8550 5170,8565 5168,8566 5375,8566 5398,8576 5478,8656 6456,8656 6466,8646 6467,8645 6479,8634 6500,8628 6520,8634 6535,8649 6541,8670 6538,8681 6564,8681 6564,8680 6558,8660 6564,8639 ; 5670,8339 5650,8333 5650,7950 5900,7950 5900,7904 ; 5670,8339 5685,8354 ; 5683,9445 5689,9465 5704,9480 5725,9486 ; 5683,9445 5689,9424 5704,9409 5725,9403 ; 5725,9403 5745,9409 5760,9424 5766,9445 ; 5725,9486 5745,9480 5760,9465 5766,9445 ; 5858,8928 6064,8928 ; 5858,8928 6064,8928 ; 5858,8928 5853,8934 5872,8942 6017,9086 6019,9079 6034,9064 6055,9058 6064,9061 6242,9061 6242,9059 6242,9041 6249,9012 6261,9000 6249,8987 6242,8959 6242,8941 6245,8928 ; 5859,8474 5853,8495 5859,8515 5874,8530 5895,8536 5915,8530 5918,8528 6041,8528 6032,8562 6041,8595 6066,8620 6100,8629 6133,8620 6158,8595 6167,8562 6158,8528 7292,8528 7272,8546 6900,8546 6876,8556 6841,8590 6829,8594 ; 5859,8474 5874,8459 ; 5874,8459 5891,8454 5888,8445 ; 5888,8445 5890,8438 5875,8438 5847,8427 5841,8421 5839,8420 5824,8405 5818,8385 5820,8378 5804,8378 5795,8381 5774,8375 5759,8360 5753,8340 5759,8319 5774,8304 5795,8298 5804,8301 5895,8301 5922,8312 5926,8316 6150,8316 6177,8327 6196,8346 6395,8346 6393,8340 6399,8319 6414,8304 6435,8298 6455,8304 6458,8306 6459,8306 6459,7943 6081,7943 6080,7945 6065,7960 6045,7966 6024,7960 6009,7945 6003,7925 6009,7904 ; 5900,7904 6009,7904 ; 5900,7904 6009,7904 ; 5930,7491 5950,7485 5965,7470 5971,7450 ; 5930,7491 5909,7485 5900,7476 5900,7697 6061,7536 6085,7526 6276,7526 6326,7476 6350,7466 6801,7466 6804,7464 6825,7458 6845,7464 6860,7479 6865,7496 7495,7496 7493,7490 ; 5971,7450 6259,7450 ; 5971,7450 6259,7450 ; 5998,9445 6004,9465 6019,9480 6036,9485 ; 5998,9445 6004,9424 6019,9409 6040,9403 ; 6004,9324 5998,9345 6004,9365 6019,9380 6021,9381 6044,9404 6040,9403 ; 6036,9485 6027,9494 6018,9528 6027,9561 6052,9586 6086,9595 6119,9586 6144,9561 6153,9528 6144,9494 6119,9469 6086,9460 6076,9463 6081,9445 ; 6058,8950 6064,8970 6079,8985 6100,8991 ; 6058,8950 6064,8929 6064,8928 ; 6081,9445 6075,9424 6072,9420 6080,9423 6580,9423 6590,9426 6610,9420 6625,9405 6631,9385 6625,9364 6610,9349 6590,9343 6580,9346 6096,9346 6088,9338 6119,9330 6144,9305 6153,9272 6144,9238 6119,9213 6101,9208 6248,9208 6230,9213 6205,9238 6196,9272 6205,9305 6230,9330 6264,9339 6297,9330 6322,9305 6331,9272 6322,9238 6297,9213 6279,9208 6481,9208 6478,9220 ; 6100,8991 6120,8985 6135,8970 6141,8950 ; 6135,8928 6245,8928 ; 6135,8928 6245,8928 ; 6135,8928 6135,8929 6141,8950 ; 6259,7450 6264,7465 6279,7480 6300,7486 ; 6300,7486 6320,7480 6335,7465 6340,7450 ; 6323,7724 6171,7876 6459,7876 6459,7750 6470,7724 ; 6323,7724 6470,7724 ; 6323,7724 6470,7724 ; 6340,7450 6958,7450 ; 6340,7450 6958,7450 ; 6478,9220 6484,9240 6499,9255 6520,9261 ; 6520,9261 6540,9256 6560,9261 6580,9255 6586,9250 6589,9248 6593,9248 6586,9275 6595,9309 ; 6529,7724 6650,7724 ; 6529,7724 6650,7724 ; 6529,7724 6540,7750 6540,8306 6585,8306 6608,8316 6658,8366 7114,8366 7114,8365 7108,8345 ; 6564,8639 6579,8624 ; 6579,8624 6600,8618 6620,8624 ; 6595,9309 6618,9334 6650,9343 6681,9334 6700,9314 6718,9334 6720,9334 6704,9339 6689,9354 ; 6620,8624 6627,8631 6808,8631 6808,8630 6814,8609 ; 6650,7724 6577,7797 6566,7825 6566,7895 6563,7905 6569,7925 6584,7940 6605,7946 6625,7940 6640,7925 6646,7905 6643,7895 6643,7841 6726,7758 7054,7758 7052,7770 7059,7798 7081,7820 7110,7827 7138,7820 7160,7798 7167,7770 7165,7758 7434,7758 7434,7760 7470,7774 7544,7774 7548,7787 7535,7783 ; 6689,9354 6683,9375 6689,9395 6704,9410 6725,9416 6745,9410 6748,9408 6755,9408 6778,9398 6873,9303 6911,9303 6909,9304 6894,9319 6888,9340 ; 6758,9485 6764,9505 6779,9520 6800,9526 ; 6758,9485 6764,9464 6779,9449 6800,9443 ; 6800,9443 6820,9449 6835,9464 6841,9485 ; 6800,9526 6820,9520 6835,9505 6841,9485 ; 6814,8609 6829,8594 ; 6888,9340 6894,9360 6909,9375 6930,9381 ; 6888,9485 6894,9505 6896,9508 6890,9510 6875,9525 6869,9546 6875,9566 6882,9574 6885,9581 6904,9600 6930,9610 7430,9610 7455,9600 7512,9543 7520,9540 7535,9525 7541,9505 7541,9503 8110,9503 8133,9493 8148,9478 8376,9478 8379,9480 8400,9486 8420,9480 8435,9465 8441,9445 8438,9433 8493,9433 8466,9440 8409,9497 8388,9576 8409,9654 ; 6888,9485 6894,9464 6909,9449 6930,9443 ; 6930,9381 6950,9375 6965,9360 6971,9340 ; 6930,9443 6950,9449 6965,9464 6971,9485 ; 6958,7450 6964,7470 6979,7485 7000,7491 ; 6971,9340 6965,9319 6950,9304 6948,9303 7696,9303 7699,9305 7720,9311 7740,9305 7755,9290 7761,9270 7756,9251 8067,9251 8064,9254 8060,9266 8050,9263 8029,9269 8014,9284 8008,9305 8014,9325 8029,9340 8050,9346 8070,9340 8073,9338 8310,9338 8308,9345 ; 6971,9485 6965,9505 6950,9520 6944,9522 6946,9525 6950,9539 7415,9539 7450,9503 7383,9503 7380,9505 7360,9511 7339,9505 7324,9490 7318,9470 7324,9449 7339,9434 7341,9433 7301,9433 7300,9435 7285,9450 7265,9456 7244,9450 7229,9435 7226,9424 7220,9426 7199,9420 7184,9405 7178,9385 7184,9364 7199,9349 7220,9343 7230,9346 7448,9346 7448,9345 ; 7000,7491 7020,7485 7035,7470 7041,7450 ; 7041,7450 7158,7450 ; 7041,7450 7158,7450 ; 7108,8345 7114,8324 ; 7114,8324 7129,8309 ; 7118,8235 7124,8255 7139,8270 7160,8276 ; 7118,8235 7124,8214 7139,8199 7160,8193 ; 7123,8020 7129,8040 7144,8055 7165,8061 ; 7123,8020 7129,7999 7144,7984 7165,7978 ; 7129,8309 7150,8303 ; 7150,8303 7170,8309 ; 7158,7450 7164,7470 7179,7485 7200,7491 ; 7160,8193 7180,8199 7195,8214 7201,8235 ; 7160,8276 7180,8270 7195,8255 7201,8235 ; 7165,7978 7185,7984 7200,7999 7206,8020 ; 7165,8061 7185,8055 7200,8040 7206,8020 ; 7170,8309 7184,8322 7231,8276 7240,8272 7229,8260 7223,8240 7228,8220 7223,8200 7227,8184 7224,8180 7218,8160 7224,8139 7239,8124 7260,8118 7280,8124 7283,8126 7300,8126 7311,8131 7323,8135 7359,8170 7359,8121 7355,8125 7335,8131 ; 7200,7491 7220,7485 7235,7470 v1@7241,7450 ; 7220,8888 7896,8888 ; 7220,8888 7896,8888 ; 7220,8888 7228,8890 7250,8912 7257,8941 7257,8959 7250,8987 7260,8997 7263,9011 7263,9076 7423,9076 7424,9074 7439,9059 7460,9053 7480,9059 7495,9074 7501,9095 7499,9101 7544,9101 7539,9084 7545,9063 7560,9048 7576,9043 7579,9034 7594,9019 7615,9013 7625,9016 7629,9004 7644,8989 7665,8983 7685,8989 7688,8991 7702,8991 7698,8975 7704,8954 7719,8939 7718,8935 7724,8914 7739,8899 7760,8893 7780,8899 7788,8907 7798,8911 7929,8911 7911,8903 ; v1@7241,7450 7358,7450 ; v1@7241,7450 7358,7450 ; 7293,7825 7299,7804 7314,7789 7335,7783 ; 7293,7825 7299,7845 7314,7860 7335,7866 ; 7293,8090 7299,8110 7314,8125 7335,8131 ; 7293,8090 7299,8069 ; 7299,8069 7314,8054 ; 7314,8054 7335,8048 ; 7335,7783 7355,7789 7361,7795 7371,7771 7400,7759 7428,7771 7440,7800 7440,7826 7450,7823 7460,7826 7493,7826 7493,7825 ; 7335,7866 7355,7860 7359,7856 7359,8058 7355,8054 ; 7335,8048 7355,8054 ; 7358,7450 7364,7470 7379,7485 7400,7491 ; 7400,7491 7420,7485 7435,7470 7441,7450 ; 7433,8241 7433,8240 7422,8230 7428,8228 7440,8200 7440,7986 7444,7987 7449,8005 7464,8020 7485,8026 7505,8020 7510,8016 7512,8015 7514,8020 7529,8035 7550,8041 7570,8035 7573,8033 8014,8033 8014,8034 8008,8055 8008,8056 7550,8056 7526,8066 7491,8101 7481,8125 7481,8436 ; 7433,8241 7438,8252 7443,8264 7443,8265 7443,8543 7465,8521 7469,8509 7478,8500 7469,8490 7463,8470 7469,8449 7481,8436 ; 7441,7450 7529,7450 ; 7441,7450 7529,7450 ; 7448,9345 7454,9324 ; 7454,9324 7469,9309 7490,9303 ; 7490,9303 7510,9309 7525,9324 ; 7493,7490 7499,7469 7514,7454 7529,7450 ; 7493,7825 7499,7804 7514,7789 7535,7783 ; 7525,9324 7639,9324 ; 7525,9324 7531,9345 ; 7531,9345 7531,9346 7633,9346 7633,9345 ; 7633,9345 7639,9324 ; 7639,9324 7654,9309 7675,9303 ; 7675,9303 7695,9309 7710,9324 ; 7710,9324 7716,9345 ; 7716,9345 7716,9346 8308,9346 8308,9345 ; 7896,8888 7911,8903 ; 7968,8773 8546,8773 ; 7968,8773 8546,8773 ; 7968,8773 7970,8774 7985,8789 7991,8810 7990,8814 8005,8829 8007,8835 8015,8833 8035,8839 8050,8854 8056,8875 8050,8895 8035,8910 8033,8911 8231,8911 8286,8856 8310,8846 8735,8846 8733,8840 8733,8838 8630,8838 8618,8833 8607,8829 8546,8773 ; 8409,9654 8466,9711 8545,9732 8623,9711 8680,9654 ; 8457,9008 8640,9008 8663,8998 8678,8983 10905,8983 10928,8973 10968,8933 ; 8457,9008 8460,9021 8501,9021 8525,9011 11450,9011 11450,8933 ; 8679,9744 8694,9729 8715,9723 8735,9729 8738,9731 11189,9731 11179,9720 11173,9700 11179,9679 11194,9664 11215,9658 11235,9664 11238,9666 11450,9666 11450,9433 11438,9433 11348,9523 11325,9533 10350,9533 10350,9534 ; 8680,9654 8701,9576 8680,9497 8623,9440 8596,9433 8731,9433 8761,9463 8785,9473 9782,9473 9784,9480 9799,9495 9820,9501 9840,9495 9855,9480 9861,9460 9857,9443 10121,9443 10201,9523 10225,9533 10279,9533 10279,9534 ; 8772,8358 10411,8358 ; 8772,8358 10411,8358 ; 8772,8358 8776,8375 8770,8395 8755,8410 8735,8416 8714,8410 8699,8395 8698,8393 8641,8393 8641,8395 8635,8415 8631,8420 8628,8426 8821,8426 8834,8414 8855,8408 8875,8414 8890,8429 8896,8450 8894,8456 9921,8456 9919,8455 9904,8440 9898,8420 9904,8399 9919,8384 9933,8380 9955,8371 10423,8371 10411,8358 ; 8778,9555 8784,9575 8799,9590 8820,9596 ; 8778,9555 8784,9534 ; 8784,9534 8799,9519 8820,9513 ; 8820,9513 8840,9519 8855,9534 ; 8820,9596 8840,9590 8855,9575 8861,9555 ; 8841,7450 9008,7450 ; 8841,7450 9008,7450 ; 8841,7450 8841,7451 ; 8841,7451 8837,7466 8844,7459 8865,7453 ; 8841,9078 11450,9078 ; 8841,9078 11450,9078 ; 8841,9078 8841,9080 8835,9100 8835,9101 11450,9101 11450,9078 ; 8848,8898 9620,8898 9643,8888 9653,8879 9665,8875 9680,8860 9686,8840 9686,8838 ; 8848,8898 8851,8910 ; 8851,8910 8849,8916 10139,8916 10129,8905 10123,8885 ; 8855,9534 8861,9555 ; 8865,7453 8882,7458 8900,7453 ; 8900,7453 8920,7459 8935,7474 8941,7495 ; 8941,7495 8941,7496 9793,7496 9793,7495 ; 8963,7774 9496,7774 ; 8963,7774 9496,7774 ; 8963,7774 8970,7800 8961,7831 8993,7831 8994,7829 9009,7814 9030,7808 9050,7814 9065,7829 9071,7850 9069,7858 9071,7856 9095,7846 9472,7846 9467,7825 9474,7796 9496,7774 ; 8998,9554 9004,9574 9019,9589 9040,9595 ; 8998,9554 9004,9533 9019,9518 9040,9512 ; 9008,7450 9008,7451 ; 9008,7451 9014,7471 9029,7486 9050,7492 ; 9040,9512 9060,9518 9075,9533 9081,9554 ; 9040,9595 9060,9589 9075,9574 9081,9554 ; 9050,7492 9070,7486 9085,7471 9091,7451 ; 9090,8583 9116,8583 ; 9090,8583 9116,8583 ; 9090,8583 9085,8600 9070,8615 9068,8616 9836,8616 9839,8614 9860,8608 9880,8614 9895,8629 9900,8646 10196,8646 10206,8636 10230,8626 10274,8626 10274,8625 10268,8605 ; 9091,7450 9569,7450 ; 9091,7450 9569,7450 ; 9091,7450 9091,7451 ; 9116,8583 9129,8595 9150,8601 9170,8595 9185,8580 9190,8563 11226,8563 11239,8575 11260,8581 11280,8575 11295,8560 11300,8543 11340,8543 11352,8538 ; 9172,9251 11450,9251 ; 9172,9251 11450,9251 ; 9172,9251 9175,9254 9181,9275 9175,9295 9160,9310 9140,9316 9119,9310 9106,9298 8960,9298 8955,9315 8940,9330 8921,9336 10215,9336 10242,9347 10267,9372 10278,9400 10278,9425 10279,9428 10294,9414 10315,9408 ; 9208,9555 9214,9575 9229,9590 9250,9596 ; 9208,9555 9214,9534 ; 9214,9534 9229,9519 9250,9513 ; 9250,9513 9270,9519 9285,9534 ; 9250,9596 9270,9590 9285,9575 9291,9555 ; 9285,9534 9291,9555 ; 9408,9554 9414,9574 9429,9589 9450,9595 ; 9408,9554 9414,9533 9429,9518 9450,9512 ; 9450,9512 9470,9518 9485,9533 9491,9554 ; 9450,9595 9470,9589 9485,9574 9491,9554 ; 9568,7455 9574,7475 9589,7490 9610,7496 ; 9568,7455 9569,7450 ; 9610,7496 9630,7490 9645,7475 9651,7455 ; 9628,9554 9634,9574 9649,9589 9670,9595 ; 9628,9554 9634,9533 9649,9518 9670,9512 ; 9650,7450 9794,7450 ; 9650,7450 9794,7450 ; 9650,7450 9651,7455 ; 9670,9512 9690,9518 9705,9533 9711,9554 ; 9670,9595 9690,9589 9705,9574 9711,9554 ; 9686,8838 10511,8838 ; 9686,8838 10511,8838 ; 9713,9555 9719,9575 9734,9590 9755,9596 ; 9713,9555 9719,9534 ; 9719,9534 9734,9519 9755,9513 ; v1@9750,9555 v1(9755,9555) ; v1@9750,9555 v1(9755,9555) ; 9755,9513 9775,9519 9790,9534 ; 9755,9596 9775,9590 9790,9575 9796,9555 ; 9790,9534 10279,9534 ; 9790,9534 9796,9555 ; 9793,7455 9798,7475 9793,7495 ; 9793,7455 9794,7450 ; 10123,8885 10129,8864 10144,8849 10165,8843 ; 10165,8843 10185,8849 10200,8864 10205,8879 ; 10205,8879 10209,8864 10224,8849 10245,8843 ; 10245,8843 10265,8849 10280,8864 10286,8885 ; 10268,8605 10274,8584 10289,8569 10310,8563 ; 10268,9340 10274,9360 10289,9375 10310,9381 ; 10268,9340 10274,9319 10289,9304 10310,9298 ; 10273,9555 10279,9575 10294,9590 10315,9596 ; 10273,9555 10279,9534 ; 10286,8885 10280,8905 10270,8916 10439,8916 10429,8905 10423,8885 ; 10310,8563 10330,8569 10345,8584 10351,8605 ; 10310,9298 10330,9304 10345,9319 10351,9340 ; 10310,9381 10330,9375 10345,9360 10351,9340 ; 10315,9408 10335,9414 10350,9429 10356,9450 ; 10315,9596 10335,9590 10350,9575 10356,9555 ; 10350,9534 10356,9555 ; 10351,8605 10345,8625 10345,8626 10631,8626 10639,8619 10660,8613 10680,8619 10695,8634 10700,8651 11450,8651 11450,8538 ; 10356,9450 10352,9466 10867,9466 10863,9450 ; 10412,8113 10412,8085 10405,8058 10431,8058 10434,8060 10455,8066 10475,8060 10490,8045 10496,8025 10492,8008 ; 10412,8113 10403,8144 10380,8167 10366,8171 11146,8171 11149,8169 11170,8163 11190,8169 11205,8184 11211,8205 11205,8225 11190,8240 11170,8246 11149,8240 11146,8238 10702,8238 10706,8255 10700,8275 10700,8276 11450,8276 11450,8192 11440,8158 ; 10423,8885 10429,8864 10444,8849 10465,8843 ; 10465,8843 10485,8849 10500,8864 10506,8885 ; 10492,8008 10716,8008 ; 10492,8008 10716,8008 ; 10494,8398 10669,8398 10680,8401 10700,8395 10715,8380 10721,8360 10719,8353 ; 10494,8398 10496,8405 10494,8411 10601,8411 10604,8409 10625,8403 10645,8409 10660,8424 10666,8445 10663,8456 11265,8456 11269,8444 11284,8429 11305,8423 11325,8429 11340,8444 11346,8465 11344,8471 11345,8471 11450,8471 11450,8353 ; 10506,8885 10500,8905 10490,8916 10669,8916 10659,8905 10653,8885 ; 10511,8838 10530,8858 10534,8870 10549,8885 10570,8891 10590,8885 10605,8870 10611,8850 10605,8829 10590,8814 10578,8810 10576,8808 ; 10576,8808 11450,8808 ; 10576,8808 11450,8808 ; 10642,7558 11450,7558 ; 10642,7558 11450,7558 ; 10642,7558 10643,7564 10645,7563 10665,7569 10680,7584 10685,7600 10967,7600 10974,7584 10978,7573 ; 10653,8885 10659,8864 10674,8849 10695,8843 ; 10695,8843 10715,8849 10730,8864 10736,8885 ; 10716,8008 10729,8020 10750,8026 10770,8020 10785,8005 10791,7985 10791,7983 10796,7983 10856,8043 10880,8053 11191,8053 ; 10719,8353 11450,8353 ; 10719,8353 11450,8353 ; 10736,8885 10730,8905 10720,8916 10774,8916 10764,8905 10758,8885 ; 10758,8885 10764,8864 10779,8849 10800,8843 ; 10772,7738 10781,7771 10806,7796 10840,7805 10873,7796 10898,7771 10907,7738 ; 10772,7738 10781,7704 10796,7689 10548,7689 10558,7699 10567,7733 10560,7758 10568,7758 10570,7758 10590,7764 10596,7769 10599,7770 10600,7773 10605,7779 10611,7800 10605,7820 10600,7826 10599,7829 10596,7830 10590,7835 10570,7841 10568,7841 10565,7841 10565,7909 10563,7916 10774,7916 10774,7914 10774,7875 10773,7875 10774,7874 10774,7836 10777,7822 10787,7812 10801,7809 10839,7809 10840,7808 10840,7809 10879,7809 10892,7812 10902,7822 10905,7836 10905,7847 10947,7888 11355,7888 11401,7908 11421,7955 11401,8001 11390,8006 11380,8015 11360,8021 11356,8020 11355,8021 11326,8021 11325,8021 11323,8021 11256,8021 11250,8040 11235,8055 11215,8061 11194,8055 11191,8053 ; 10800,8843 10820,8849 10835,8864 10841,8885 ; 10841,8885 10835,8905 10825,8916 10891,8916 10931,8876 10955,8866 11450,8866 11450,8808 ; 10863,9450 10869,9429 10884,9414 10905,9408 ; 10905,9408 10925,9414 10940,9429 10946,9450 ; 10907,7738 10898,7704 10883,7689 11010,7689 11030,7680 11041,7676 11045,7665 11054,7645 11054,7605 11045,7584 11041,7573 ; 10946,9450 10942,9466 11311,9466 11401,9376 11425,9366 11450,9366 11450,9251 ; 10968,8933 11450,8933 ; 10968,8933 11450,8933 ; 10978,7573 10989,7569 11010,7560 11030,7569 11041,7573 ; 11352,8538 11450,8538 ; 11352,8538 11450,8538 ; 11440,8158 11450,8123 11450,7558 ; 5253,9230 5259,9250 5274,9265 5295,9271 5304,9268 5565,9268 5575,9271 5584,9268 5880,9268 5890,9271 5910,9265 5925,9250 5931,9230 5925,9209 5910,9194 5890,9188 5880,9191 5584,9191 5575,9188 5565,9191 5304,9191 5295,9188 5274,9194 5259,9209 5253,9230 ; 6196,9528 6205,9561 6230,9586 6264,9595 6297,9586 6322,9561 6331,9528 6322,9494 6297,9469 6264,9460 6230,9469 6205,9494 6196,9528 ; 6912,8150 6919,8178 6940,8200 6919,8221 6912,8250 6919,8278 6941,8300 6970,8307 6998,8300 7020,8278 7027,8250 7020,8221 6999,8200 7020,8178 7027,8150 7020,8121 6998,8099 6970,8092 6941,8099 6919,8121 6912,8150 ; 8738,8237 8739,8236 8754,8181 8801,8228 8825,8238 9327,8238 9323,8255 9329,8275 9344,8290 9346,8291 8762,8291 8766,8275 8760,8254 8745,8239 8738,8237
  Bottom Layer, Bottom w24: v1(6225,6860) v1@6780,6860 ; v1(6930,9340) v1@7675,9340 ; v1(7010,7060) 7010,7050 7040,7020 7070,6990 v1(7500,6990) ; v1(7200,9210) 8825,9210 v1(12265,9210) ; v1(7675,9345) v1(8350,9345) 8800,9345 8805,9340 v1(10310,9340) ; v1(9620,7250) 9620,7270 9710,7360 v1(9775,7360) ; 9735,7930 v1(10250,7930) ; v1(9865,7785) 10140,7785 10165,7810 10410,7810 10420,7800 v1(10570,7800) ; v1@10460,8710 v1(10570,8710)